# Altium PCB matrix_connect.PcbDoc
Units mm, origin at the board's own origin, x right, y up, seen from the top; angles counter-clockwise.
Board outline 25 x 480 mm, 2 copper layers (Top Layer, Bottom Layer); 32 components, 48 nets, 704 pads, 688 vias.
Unrouted connection lines stored in the file: 329.
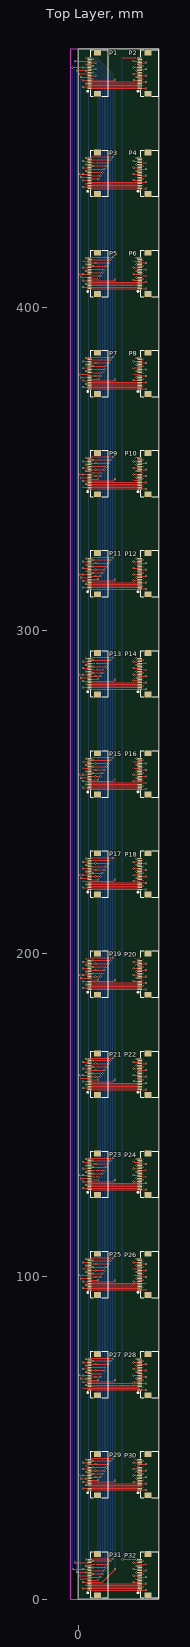
[diagram p0: Top Layer view]
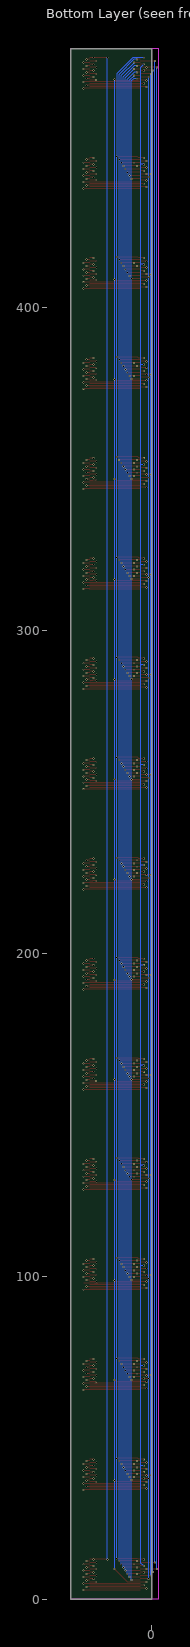
[diagram p1: Bottom Layer view, seen from below]
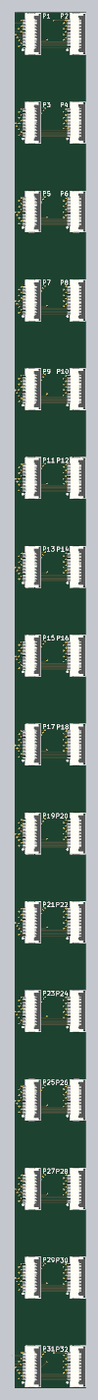
[diagram p2: 3D render of the assembled board from above, using the file's embedded part models]

## Layer stack, top to bottom
Top Solder: solder mask 0.0102, Solder Resist, Dk 3.5
Top Layer: signal copper 0.0356
Dielectric 1: dielectric 0.32, FR-4, Dk 4.8
Bottom Layer: signal copper 0.0356
Bottom Solder: solder mask 0.0102, Solder Resist, Dk 3.5

## Board outline
0,0 25,0 25,480 0,480

## Design rules (kind name [scope] priority, off if disabled: settings)
Clearance [All] p1: gap=0.152
PolygonConnect [All] p1: connectstyle=Relief reliefconductorwidth=0.254 reliefentries=4 polygonreliefangle="90 Angle" airgapwidth=0.254
RoutingVias [All] p1: holewidth=0.3 width=0.6 viastyle="Through Hole" minholewidth=0.3 minwidth=0.6 maxholewidth=0.711 maxwidth=1.27
SolderMaskExpansion [All] p1: expansion=0.102
Width [All] p1: maxlimit=0.254 minlimit=0.254 preferedwidth=0.254
30 further rules are at their usual default settings.

## Classes and differential pairs
component class martix_connect_2: P17 P18 P19 P20 P21 P22 P23 P24 P25 P26 P27 P28 P29 P30 P31 P32
component class martix_connect: P1 P2 P3 P4 P5 P6 P7 P8 P9 P10 P11 P12 P13 P14 P15 P16

## Components (designator, comment, footprint, x,y, rotation, side; value= is the part's Value field where it differs from the comment)
P1 "Header 20" "FPC0.5 2H-WS-20P" 6,472.516 r90 top
P2 "Header 20" "FPC0.5 2H-WS-20P" 21.59,472.517 r90 top
P3 "Header 20" "FPC0.5 2H-WS-20P" 6,441.518 r90 top
P4 "Header 20" "FPC0.5 2H-WS-20P" 21.59,441.519 r90 top
P5 "Header 20" "FPC0.5 2H-WS-20P" 6,410.52 r90 top
P6 "Header 20" "FPC0.5 2H-WS-20P" 21.59,410.52 r90 top
P7 "Header 20" "FPC0.5 2H-WS-20P" 6,379.521 r90 top
P8 "Header 20" "FPC0.5 2H-WS-20P" 21.59,379.522 r90 top
P9 "Header 20" "FPC0.5 2H-WS-20P" 6,348.523 r90 top
P10 "Header 20" "FPC0.5 2H-WS-20P" 21.59,348.524 r90 top
P11 "Header 20" "FPC0.5 2H-WS-20P" 6,317.525 r90 top
P12 "Header 20" "FPC0.5 2H-WS-20P" 21.59,317.526 r90 top
P13 "Header 20" "FPC0.5 2H-WS-20P" 6,286.527 r90 top
P14 "Header 20" "FPC0.5 2H-WS-20P" 21.59,286.527 r90 top
P15 "Header 20" "FPC0.5 2H-WS-20P" 6,255.529 r90 top
P16 "Header 20" "FPC0.5 2H-WS-20P" 21.59,255.529 r90 top
P17 "Header 20" "FPC0.5 2H-WS-20P" 6,224.53 r90 top
P18 "Header 20" "FPC0.5 2H-WS-20P" 21.59,224.531 r90 top
P19 "Header 20" "FPC0.5 2H-WS-20P" 6,193.532 r90 top
P20 "Header 20" "FPC0.5 2H-WS-20P" 21.59,193.533 r90 top
P21 "Header 20" "FPC0.5 2H-WS-20P" 6,162.534 r90 top
P22 "Header 20" "FPC0.5 2H-WS-20P" 21.59,162.534 r90 top
P23 "Header 20" "FPC0.5 2H-WS-20P" 6,131.536 r90 top
P24 "Header 20" "FPC0.5 2H-WS-20P" 21.59,131.536 r90 top
P25 "Header 20" "FPC0.5 2H-WS-20P" 6,100.538 r90 top
P26 "Header 20" "FPC0.5 2H-WS-20P" 21.59,100.538 r90 top
P27 "Header 20" "FPC0.5 2H-WS-20P" 6,69.539 r90 top
P28 "Header 20" "FPC0.5 2H-WS-20P" 21.59,69.54 r90 top
P29 "Header 20" "FPC0.5 2H-WS-20P" 6,38.541 r90 top
P30 "Header 20" "FPC0.5 2H-WS-20P" 21.59,38.541 r90 top
P31 "Header 20" "FPC0.5 2H-WS-20P" 6,7.543 r90 top
P32 "Header 20" "FPC0.5 2H-WS-20P" 21.59,7.543 r90 top

## Footprints (in the part's own frame and the unit in brackets; to place one, negate y for a bottom-side part, rotate by r counter-clockwise, add the part's x,y. Pads: shape width x height; smd on the part's side, far side on the other; paste and mask are expansions set on the pad)
"FPC0.5 2H-WS-20P" [mm] "长：14.2mm，宽：5.2mm，高：2mm"
  rect 1.8x2.2 smd: 0(-6.4,0) 0(6.4,0)
  rect 0.3x1.3 smd: 1(-4.75,2.497) 2(-4.25,2.497) 3(-3.75,2.497) 4(-3.25,2.497) 5(-2.75,2.497) 6(-2.25,2.497) 7(-1.75,2.497) 8(-1.25,2.497) 9(-0.75,2.497) 10(-0.25,2.497) 11(0.25,2.497) 12(0.75,2.497) 13(1.25,2.497) 14(1.75,2.497) 15(2.25,2.497) 16(2.75,2.497) 17(3.25,2.497) 18(3.75,2.497) 19(4.25,2.497) 20(4.75,2.497)
  silkscreen extent -7.18,-3.3 7.18,3.23, body extent -7.1,-3.15 7.1,2.85, height 2

## Part data
P1 P2 P3 P4 P5 P6 P7 P8 P9 P10 P11 P12 P13 P14 P15 P16 P17 P18 P19 P20 P21 P22 P23 P24 P25 P26 P27 P28 P29 P30 P31 P32: "Header, 20-Pin"

## Via types
v1: diameter 0.6, hole 0.3, Top Layer to Bottom Layer, 688 vias

## Nets (pads, with @x,y where several pads share a name; then routed paths per layer and width w, separated by ;. In a path a pad name is that pad's centre, name@x,y a point inside that pad or via, vN(x,y) a via of type N, cw(c..) or ccw(c..) an arc to the next point about the centre after c; other vN are vias at no path point)
GND: P1.3 P1.4 P2.3 P2.4 P3.3 P3.4 P4.3 P4.4 P5.3 P5.4 P6.3 P6.4 P7.3 P7.4 P8.3 P8.4 P9.3 P9.4 P10.3 P10.4 P11.3 P11.4 P12.3 P12.4 P13.3 P13.4 P14.3 P14.4 P15.3 P15.4 P16.3 P16.4 P17.3 P17.4 P18.3 P18.4 P19.3 P19.4 P20.3 P20.4 P21.3 P21.4 P22.3 P22.4 P23.3 P23.4 P24.3 P24.4 P25.3 P25.4 P26.3 P26.4 P27.3 P27.4 P28.3 P28.4 P29.3 P29.4 P30.3 P30.4 P31.3 P31.4 P32.3 P32.4 | length 564.3
  Top Layer w0.254: v1(2.426,4.293) P31.4 3.504,4.294 P32.4@19.093,4.294 ; v1(2.426,35.291) P29.4 3.504,35.292 P30.4@19.093,35.292 ; v1(2.426,66.289) P27.4 P28.4 ; v1(2.426,97.288) P25.4 ; v1(2.426,128.286) P23.4 ; v1(2.426,159.284) P21.4 3.504,159.285 19.093,159.285 18.016,159.284 ; v1(2.426,190.282) P19.4 3.504,190.283 19.093,190.283 18.016,190.283 ; v1(2.426,221.28) P17.4 3.504,221.281 19.093,221.281 18.016,221.281 ; v1(2.426,252.279) P15.4 3.504,252.28 19.093,252.28 18.016,252.279 ; v1(2.426,283.277) P13.4 3.504,283.278 P14.4 18.016,283.277 ; v1(2.426,314.275) P11.4 3.504,314.276 P12.4 18.016,314.276 ; v1(2.426,345.273) P9.4 3.504,345.274 P10.4 18.016,345.274 ; v1(2.426,376.271) P7.4 3.504,376.272 P8.4 18.016,376.272 ; v1(2.426,407.27) P5.4 3.504,407.271 P6.4 18.016,407.27 ; v1(2.426,438.268) P3.4 3.504,438.269 P4.4 ; v1(2.426,469.266) P1.4 3.504,469.267 P2.4 ; P31.3 P32.3 19.093,3.794 v1(20.17,3.793) ; P29.3 P30.3 19.093,34.792 v1(20.17,34.791) ; P27.3 P28.3 19.093,65.79 v1(20.17,65.79) ; P25.3 P26.3 18.274,96.788 ; P23.3 P24.3 19.093,127.787 v1(20.17,127.786) ; P21.3 19.092,158.784 P22.3 ; P19.3 19.092,189.782 P20.3 ; P17.3 19.092,220.78 P18.3 ; P15.3 19.092,251.779 P16.3 ; P13.3 19.092,282.777 P14.3 ; P11.3 19.092,313.775 P12.3 ; P9.3 19.092,344.773 P10.3 v1(20.17,344.774) ; P7.3 19.092,375.771 P8.3 v1(20.17,375.772) ; P5.3 P6.3 P6.3 v1(20.17,406.77) ; P3.3 P4.3 P4.3 v1(20.17,437.769) ; P1.3 P2.3 P2.3 v1(20.17,468.767) ; P27.4@3.504,66.29 P28.4@19.093,66.29 ; P23.4 P24.4 ; 4.312,97.288 P25.4 ; 18.016,4.293 P32.4 ; 18.016,35.291 P30.4 ; 18.016,438.269 P4.4 ; 18.288,97.282 18.288,97.288 P26.4 3.504,97.289 P25.4 ; P26.3 v1(20.17,96.788) ; P22.3 v1(20.17,158.784) ; P20.3 v1(20.17,189.783) ; P18.3 v1(20.17,220.781) ; P16.3 v1(20.17,251.779) ; P14.3 v1(20.17,282.777) ; P12.3 v1(20.17,313.776)
M_C_1: P1.6 P3.6 P5.6 P7.6 P9.6 P11.6 P13.6 P15.6 P17.6 P19.6 P21.6 P23.6 P25.6 P27.6 P29.6 P31.6 | length 615.8
  Top Layer w0.254: v1(1.566,5.293) P31.6 7.452,5.293 v1(11.43,9.271) ; v1(1.566,36.291) P29.6 3.519,36.275 11.002,36.275 v1(11.43,36.703) ; v1(1.566,67.289) P27.6 3.519,67.273 10.922,67.273 11.43,67.781 v1(11.43,67.818) ; v1(1.566,98.288) P25.6 5.885,98.288 5.965,98.208 10.959,98.208 v1(11.43,98.679) ; v1(1.566,129.286) P23.6 3.519,129.27 10.906,129.27 v1(11.43,129.794) ; v1(1.566,160.284) P21.6 3.519,160.268 10.789,160.268 v1(11.43,160.909) ; v1(1.566,191.282) P19.6 3.519,191.266 11.053,191.266 v1(11.43,191.643) ; v1(1.566,222.28) P17.6 3.519,222.264 10.936,222.264 v1(11.43,222.758) ; v1(1.566,253.279) P15.6 3.519,253.262 10.819,253.262 v1(11.43,253.873) ; v1(1.566,284.277) P13.6 3.519,284.261 10.957,284.261 v1(11.43,284.734) ; v1(1.566,315.275) P11.6 3.519,315.259 10.967,315.259 v1(11.43,315.722) ; v1(1.566,346.273) P9.6 3.519,346.257 10.85,346.257 v1(11.43,346.837) ; v1(1.566,377.271) P7.6 3.529,377.246 10.978,377.246 v1(11.43,377.698) ; v1(1.566,408.27) P5.6 3.512,408.261 11.132,408.261 v1(11.43,408.559) ; v1(1.566,439.268) P3.6 ; v1(1.566,470.266) P1.6 4.198,470.266 4.292,470.172 11.067,470.172 v1(11.43,470.535)
  Bottom Layer w0.254: v1(11.43,9.271) v1(11.43,36.703) v1(11.43,67.818) v1(11.43,98.679) v1(11.43,129.794) v1(11.43,160.909) v1(11.43,191.643) v1(11.43,222.758) v1(11.43,253.873) v1(11.43,284.734) v1(11.43,315.722) v1(11.43,346.837) v1(11.43,377.698) v1(11.43,408.559) v1(11.43,470.535)
M_C_2: P1.7 P3.7 P5.7 P7.7 P9.7 P11.7 P13.7 P15.7 P17.7 P19.7 P21.7 P23.7 P25.7 P27.7 P29.7 P31.7 | length 508.6
  Top Layer w0.254: P31.7 6.223,5.793 v1(6.223,5.944) ; P29.7 6.127,36.791 v1(6.19,36.854) ; P27.7 6.127,67.789 v1(6.19,67.853) ; P25.7 v1(6.205,98.788) ; P23.7 6.127,129.786 v1(6.19,129.849) ; P21.7 6.127,160.784 v1(6.19,160.847) ; P19.7 6.127,191.782 v1(6.19,191.845) ; P17.7 6.127,222.78 v1(6.19,222.844) ; P15.7 6.127,253.779 v1(6.19,253.842) ; P13.7 6.127,284.777 v1(6.19,284.84) ; P11.7 v1@6.297,315.775 ; P9.7 6.16,346.773 v1(6.223,346.836) ; P7.7 6.296,377.771 v1(6.243,377.825) ; P5.7 6.18,408.77 v1(6.25,408.84) ; P3.7 v1(6.256,439.768) ; P1.7 v1(4.58,470.766)
  Bottom Layer w0.254: v1(4.58,470.766) 5.611,470.766 6.256,470.121 v1(6.256,439.768) v1@6.256,408.813 ; v1(6.223,5.944) 6.223,5.908 6.256,5.875 6.256,36.854 6.256,253.842 6.256,284.84 6.256,346.836 v1@6.256,408.813 ; v1@6.223,377.825 v1(6.243,377.825) ; v1(6.25,408.84) 6.25,408.819 v1@6.256,408.813
  other v1: 6.19,315.838
M_C_3: P1.8 P3.8 P5.8 P7.8 P9.8 P11.8 P13.8 P15.8 P17.8 P19.8 P21.8 P23.8 P25.8 P27.8 P29.8 P31.8 | length 506.9
  Top Layer w0.254: v1(0.889,37.338) 0.936,37.291 v1(2.426,37.291) P29.8 ; v1(0.889,99.314) 0.915,99.288 P25.8 ; v1(0.889,130.302) 0.905,130.286 P23.8 ; v1(0.889,161.29) 0.895,161.284 P21.8 ; v1(0.889,192.278) 0.893,192.282 P19.8 ; v1(0.889,223.266) 0.903,223.28 P17.8 ; v1(0.889,285.242) 0.924,285.277 P13.8 ; v1(0.889,347.218) 0.944,347.273 P9.8 ; v1(0.889,378.333) 0.951,378.271 P7.8 ; v1(0.889,409.321) 0.94,409.27 P5.8 ; v1(0.889,440.309) 0.93,440.268 P3.8 ; v1@0.889,471.266 P1.8 ; v1@0.926,68.289 v1(2.426,68.289) P27.8 ; v1(0.934,316.275) P11.8 ; v1(0.959,6.293) P31.8 ; v1@0.991,254.279 P15.8
  Bottom Layer w0.254: v1(0.889,471.297) v1(0.889,440.309) v1(0.889,409.321) v1(0.889,378.333) v1(0.889,347.218) v1@0.889,316.23 ; v1@0.926,68.289 v1(0.889,68.326) ; v1(0.934,316.275) v1@0.889,316.23 ; v1(0.959,6.293) 0.889,6.363 v1(0.889,37.338) v1(0.889,68.326) ; v1(0.889,68.326) v1(0.889,99.314) v1(0.889,130.302) v1(0.889,161.29) v1(0.889,192.278) v1(0.889,223.266) v1(0.889,254.254) v1(0.889,285.242) v1@0.889,316.23
M_C_4: P1.9 P3.9 P5.9 P7.9 P9.9 P11.9 P13.9 P15.9 P17.9 P19.9 P21.9 P23.9 P25.9 P27.9 P29.9 P31.9 | length 518.4
  Top Layer w0.254: P31.9 v1(6.894,6.793) ; P29.9 v1(5.44,37.791) v1(6.872,37.791) ; P27.9 v1(5.44,68.789) v1(6.872,68.789) ; P25.9 v1(5.44,99.788) v1(6.872,99.788) ; P23.9 v1(5.44,130.786) v1(6.872,130.786) ; P21.9 v1(5.44,161.784) v1(6.872,161.784) ; P19.9 v1(5.44,192.782) v1(6.872,192.782) ; P17.9 v1(5.44,223.78) v1(6.872,223.78) ; P15.9 v1(5.44,254.779) v1(6.872,254.779) ; P13.9 v1(5.44,285.777) v1(6.872,285.777) ; P11.9 v1(5.44,316.775) v1(6.872,316.775) ; P9.9 v1(5.44,347.773) v1(6.905,347.773) ; P7.9 v1(5.44,378.771) v1(6.915,378.771) ; P5.9 6.84,409.77 v1(6.907,409.702) ; P3.9 v1(6.907,440.768) ; P1.9 v1(5.44,471.766)
  Bottom Layer w0.254: v1(5.44,471.766) 6.907,470.299 v1(6.907,440.768) v1(6.907,409.702) v1@6.907,378.763 ; v1@6.858,378.714 v1@6.907,378.763 ; v1(6.905,347.773) v1(6.905,347.773) ; v1@6.907,6.793 6.907,37.791 6.907,254.779 6.907,316.775 v1(6.905,347.773) ; v1(6.915,378.771) v1@6.907,378.763 ; v1@6.985,347.853 v1(6.905,347.773) ; v1(6.905,347.773) v1@6.907,378.763
M_C_5: P1.10 P3.10 P5.10 P7.10 P9.10 P11.10 P13.10 P15.10 P17.10 P19.10 P21.10 P23.10 P25.10 P27.10 P29.10 P31.10 | length 517.1
  Top Layer w0.254: v1@0.254,7.293 P31.10 ; v1(0.254,38.354) 0.317,38.291 v1(1.566,38.291) P29.10 ; v1(0.254,69.342) 0.307,69.289 v1(1.566,69.289) P27.10 ; v1(0.254,100.33) 0.296,100.288 v1(1.566,100.288) P25.10 ; v1(0.254,131.318) 0.286,131.286 v1(1.566,131.286) P23.10 ; v1(0.254,162.306) 0.276,162.284 v1(1.566,162.284) P21.10 ; v1(0.254,193.294) 0.266,193.282 v1(1.566,193.282) P19.10 ; v1(0.254,224.282) 0.256,224.28 v1(1.566,224.28) P17.10 ; v1(0.254,255.27) 0.263,255.279 v1(1.566,255.279) P15.10 ; v1(0.254,286.258) 0.273,286.277 v1(1.566,286.277) P13.10 ; v1(0.254,317.246) 0.283,317.275 v1(1.566,317.275) P11.10 ; v1(0.254,348.234) 0.293,348.273 v1(1.566,348.273) P9.10 ; v1(0.254,379.222) 0.303,379.271 v1(1.566,379.271) P7.10 ; v1(0.254,410.21) 0.314,410.27 v1(1.566,410.27) P5.10 ; v1(0.254,441.325) 0.311,441.268 v1(1.566,441.268) P3.10 ; v1@0.301,472.266 P1.10
  Bottom Layer w0.254: v1(0.254,7.239) v1(0.254,38.354) v1(0.254,69.342) v1(0.254,100.33) v1(0.254,131.318) v1(0.254,162.306) v1(0.254,193.294) v1(0.254,224.282) v1(0.254,255.27) v1(0.254,286.258) v1(0.254,317.246) v1(0.254,348.234) v1(0.254,379.222) v1(0.254,410.21) v1(0.254,441.325) v1@0.254,472.186
  other v1: 0.254,472.219
M_C_6: P1.11 P3.11 P5.11 P7.11 P9.11 P11.11 P13.11 P15.11 P17.11 P19.11 P21.11 P23.11 P25.11 P27.11 P29.11 P31.11 | length 527.7
  Top Layer w0.254: P31.11 v1(4.58,7.793) v1@7.285,7.793 ; P29.11 v1(4.58,38.791) v1(7.491,38.791) ; P27.11 v1(4.58,69.789) v1(7.491,69.789) ; P25.11 v1(4.58,100.788) v1(7.491,100.788) ; P23.11 v1(4.58,131.786) v1(7.491,131.786) ; P21.11 v1(4.58,162.784) v1(7.491,162.784) ; P19.11 v1(4.58,193.782) v1(7.491,193.782) ; P17.11 v1(4.58,224.78) v1(7.491,224.78) ; P15.11 v1(4.58,255.779) v1(7.491,255.779) ; P13.11 v1(4.58,286.777) v1(7.491,286.777) ; P11.11 v1(4.58,317.775) v1(7.491,317.775) ; P9.11 v1(4.58,348.773) v1(7.524,348.773) ; P7.11 7.579,379.771 v1(7.555,379.748) ; P5.11 7.568,410.77 v1(7.555,410.756) ; P3.11 v1(7.555,441.768) ; P1.11 v1(4.58,472.766)
  Bottom Layer w0.254: v1(4.58,472.766) 5.389,472.766 7.555,470.6 v1(7.555,441.768) v1(7.555,410.756) 7.549,410.75 7.549,380.506 7.555,380.5 v1(7.555,379.748) v1@7.555,348.773 ; v1@7.493,348.742 v1(7.524,348.773) ; v1@7.555,348.742 7.555,255.779 7.555,193.782 7.555,100.788 7.555,7.809 v1(7.558,7.809)
M_C_7: P1.12 P3.12 P5.12 P7.12 P9.12 P11.12 P13.12 P15.12 P17.12 P19.12 P21.12 P23.12 P25.12 P27.12 P29.12 P31.12 | length 487.9
  Top Layer w0.254: v1(-0.381,8.382) 2.337,8.382 v1(2.426,8.293) P31.12 ; v1(-0.381,473.329) 2.235,473.329 2.362,473.202 v1(2.426,473.266) P1.12 ; v1(2.426,39.291) P29.12 ; v1(2.426,70.289) P27.12 ; v1(2.426,101.288) P25.12 ; v1(2.426,132.286) P23.12 ; v1(2.426,163.284) P21.12 ; v1(2.426,194.282) P19.12 ; v1(2.426,225.28) P17.12 ; v1(2.426,256.279) P15.12 ; v1(2.426,287.277) P13.12 ; v1(2.426,318.275) P11.12 ; v1(2.426,349.273) P9.12 ; v1(2.426,380.271) P7.12 ; v1(2.426,411.27) P5.12 ; v1(2.426,442.268) P3.12
  Bottom Layer w0.254: v1(-0.381,8.382) v1(-0.381,473.329)
M_C_8: P1.13 P3.13 P5.13 P7.13 P9.13 P11.13 P13.13 P15.13 P17.13 P19.13 P21.13 P23.13 P25.13 P27.13 P29.13 P31.13 | length 538.1
  Top Layer w0.254: P31.13 v1(8.158,8.793) ; P29.13 v1(5.44,39.791) 8.169,39.791 v1(8.174,39.786) ; P27.13 v1(5.44,70.789) 8.169,70.789 v1(8.174,70.784) ; P25.13 v1(5.44,101.788) 8.169,101.788 v1(8.174,101.783) ; P23.13 v1(5.44,132.786) 8.169,132.786 v1(8.174,132.781) ; P21.13 v1(5.44,163.784) 8.169,163.784 v1(8.174,163.779) ; P19.13 v1(5.44,194.782) 8.169,194.782 v1(8.174,194.777) ; P17.13 v1(5.44,225.78) 8.169,225.78 v1(8.174,225.775) ; P15.13 v1(5.44,256.779) 8.169,256.779 v1(8.174,256.774) ; P13.13 v1(5.44,287.777) 8.169,287.777 v1(8.174,287.772) ; P11.13 v1(5.44,318.775) 8.169,318.775 v1(8.174,318.77) ; P9.13 v1(5.44,349.773) v1(8.159,349.773) ; P7.13 8.103,380.771 v1(8.128,380.746) ; P5.13 v1(8.164,411.77) ; P3.13 v1(8.174,442.768) ; P1.13 v1(5.44,473.766)
  Bottom Layer w0.254: v1(5.44,473.766) 5.472,473.766 8.174,471.064 v1(8.174,442.768) 8.174,411.78 v1(8.164,411.77) ; v1(8.128,380.746) v1@8.174,380.746 ; v1(8.158,8.793) 8.174,8.809 v1(8.174,39.786) v1(8.174,70.784) v1(8.174,101.783) v1(8.174,132.781) v1(8.174,163.779) v1(8.174,194.777) v1(8.174,225.775) v1(8.174,256.774) v1(8.174,287.772) v1(8.174,318.77) v1@8.174,349.758 ; v1(8.159,349.773) v1@8.174,349.758 ; v1@8.174,411.77 v1@8.174,380.746 ; v1@8.174,349.758 v1@8.174,380.746
M_C_9: P1.14 P3.14 P5.14 P7.14 P9.14 P11.14 P13.14 P15.14 P17.14 P19.14 P21.14 P23.14 P25.14 P27.14 P29.14 P31.14 | length 502.5
  Top Layer w0.254: v1(-1.699,474.266) v1(1.566,474.266) P1.14 ; v1(-1.651,9.271) 1.544,9.271 v1(1.566,9.293) P31.14 ; v1(1.566,40.291) P29.14 ; v1(1.566,71.289) P27.14 ; v1(1.566,102.288) P25.14 ; v1(1.566,133.286) P23.14 ; v1(1.566,164.284) P21.14 ; v1(1.566,195.282) P19.14 ; v1(1.566,226.28) P17.14 ; v1(1.566,257.279) P15.14 ; v1(1.566,288.277) P13.14 ; v1(1.566,319.275) P11.14 ; v1(1.566,350.273) P9.14 ; v1(1.566,381.271) P7.14 ; v1(1.566,412.27) P5.14 ; v1(1.566,443.268) P3.14
  Bottom Layer w0.254: v1(-1.699,474.266) -1.651,474.218 v1(-1.651,9.271)
M_C_10: P1.15 P3.15 P5.15 P7.15 P9.15 P11.15 P13.15 P15.15 P17.15 P19.15 P21.15 P23.15 P25.15 P27.15 P29.15 P31.15 | length 547.2
  Top Layer w0.254: P31.15 v1(4.58,9.793) v1@8.749,9.793 ; P29.15 v1(4.58,40.791) 8.752,40.791 v1(8.763,40.802) ; P27.15 v1(4.58,71.789) 8.752,71.789 v1(8.763,71.8) ; P25.15 v1(4.58,102.788) 8.752,102.788 v1(8.763,102.799) ; P23.15 v1(4.58,133.786) 8.752,133.786 v1(8.763,133.797) ; P21.15 v1(4.58,164.784) 8.752,164.784 v1(8.763,164.795) ; P19.15 v1(4.58,195.782) 8.752,195.782 v1(8.763,195.793) ; P17.15 v1(4.58,226.78) 8.752,226.78 v1(8.763,226.791) ; P15.15 v1(4.58,257.779) 8.752,257.779 v1(8.763,257.79) ; P13.15 v1(4.58,288.777) 8.752,288.777 v1(8.763,288.788) ; P11.15 v1(4.58,319.775) 8.752,319.775 v1(8.763,319.786) ; P9.15 v1(4.58,350.773) v1(8.763,350.774) ; P7.15 v1(4.58,381.771) 8.754,381.771 v1(8.763,381.762) ; P5.15 v1(4.58,412.77) 8.743,412.77 v1(8.763,412.75) ; P3.15 v1(4.58,443.768) 8.733,443.768 v1(8.763,443.738) ; P1.15 v1(4.58,474.766)
  Bottom Layer w0.254: v1(4.58,474.766) 5.421,474.766 8.763,471.424 v1(8.763,443.738) v1(8.763,412.75) v1(8.763,381.762) v1(8.763,350.774) v1(8.763,319.786) v1(8.763,288.788) v1(8.763,257.79) v1(8.763,226.791) v1(8.763,195.793) v1(8.763,164.795) v1(8.763,133.797) v1(8.763,102.799) v1(8.763,71.8) v1(8.763,40.802) v1(8.763,9.779)
M_C_11: P1.16 P3.16 P5.16 P7.16 P9.16 P11.16 P13.16 P15.16 P17.16 P19.16 P21.16 P23.16 P25.16 P27.16 P29.16 P31.16 | length 495.4
  Top Layer w0.254: v1(2.426,10.293) P31.16 ; v1(2.426,41.291) P29.16 ; v1(2.426,72.289) P27.16 ; v1(2.426,103.288) P25.16 ; v1(2.426,134.286) P23.16 ; v1(2.426,165.284) P21.16 ; v1(2.426,196.282) P19.16 ; v1(2.426,227.28) P17.16 ; v1(2.426,258.279) P15.16 ; v1(2.426,289.277) P13.16 ; v1(2.426,320.275) P11.16 ; v1(2.426,351.273) P9.16 ; v1(2.426,382.271) P7.16 ; v1(2.426,413.27) P5.16 ; v1(2.426,444.268) P3.16 ; v1(2.426,475.266) P1.16
  Bottom Layer w0.254: v1(2.426,10.293) 3.302,11.169 3.302,41.275 ; v1(2.426,41.291) 3.286,41.291 3.302,41.275 ; v1(2.426,72.289) 3.276,72.289 3.302,72.263 ; v1(2.426,103.288) 3.265,103.288 3.302,103.251 ; v1(2.426,134.286) 3.255,134.286 3.302,134.239 ; v1(2.426,165.284) 3.245,165.284 3.302,165.227 ; v1(2.426,196.282) 3.235,196.282 3.302,196.215 ; v1(2.426,227.28) 3.225,227.28 3.302,227.203 ; v1(2.426,258.279) 3.263,258.279 3.302,258.318 ; v1(2.426,289.277) 3.204,289.277 3.302,289.179 ; v1(2.426,320.275) 3.283,320.275 3.302,320.294 ; v1(2.426,351.273) 3.293,351.273 3.302,351.282 ; v1(2.426,382.271) 3.301,382.271 3.302,382.27 ; v1(2.426,413.27) 3.29,413.27 3.302,413.258 ; v1(2.426,444.268) 3.28,444.268 3.302,444.246 ; v1(2.426,475.266) 3.302,474.39 3.302,444.246 ; 3.302,41.275 3.302,72.263 ; 3.302,72.263 3.302,103.251 ; 3.302,103.251 3.302,134.239 ; 3.302,134.239 3.302,165.227 ; 3.302,165.227 3.302,196.215 ; 3.302,196.215 3.302,227.203 ; 3.302,227.203 3.302,258.318 ; 3.302,258.318 3.302,289.179 ; 3.302,289.179 3.302,320.294 ; 3.302,320.294 3.302,351.282 ; 3.302,351.282 3.302,382.27 ; 3.302,382.27 3.302,413.258 ; 3.302,413.258 3.302,444.246
M_C_12: P1.17 P3.17 P5.17 P7.17 P9.17 P11.17 P13.17 P15.17 P17.17 P19.17 P21.17 P23.17 P25.17 P27.17 P29.17 P31.17 | length 556.7
  Top Layer w0.254: P31.17 v1(5.44,10.793) v1(9.4,10.793) ; P29.17 v1(5.44,41.791) 9.348,41.791 v1(9.365,41.808) ; P27.17 v1(5.44,72.789) 9.348,72.789 v1(9.365,72.806) ; P25.17 v1(5.44,103.788) 9.348,103.788 v1(9.365,103.804) ; P23.17 v1(5.44,134.786) 9.348,134.786 v1(9.365,134.803) ; P21.17 v1(5.44,165.784) 9.348,165.784 v1(9.365,165.801) ; P19.17 v1(5.44,196.782) 9.348,196.782 v1(9.365,196.799) ; P17.17 v1(5.44,227.78) 9.348,227.78 v1(9.365,227.797) ; P15.17 v1(5.44,258.779) 9.348,258.779 v1(9.365,258.795) ; P13.17 v1(5.44,289.777) 9.348,289.777 v1(9.365,289.794) ; P11.17 v1(5.44,320.775) 9.348,320.775 v1(9.365,320.792) ; P9.17 v1(5.44,351.773) 9.381,351.773 v1(9.398,351.79) ; P7.17 v1(5.44,382.771) 9.391,382.771 v1(9.398,382.778) ; P5.17 v1(5.44,413.77) 9.394,413.77 v1(9.398,413.766) ; P3.17 v1(5.44,444.768) v1(9.384,444.768) ; P1.17 v1(5.44,475.766)
  Bottom Layer w0.254: v1(5.44,475.766) 9.384,471.822 v1(9.384,444.768) 9.384,320.792 9.384,227.797 9.384,165.801 9.384,41.808 9.384,10.809 v1(9.4,10.793)
M_C_13: P1.18 P3.18 P5.18 P7.18 P9.18 P11.18 P13.18 P15.18 P17.18 P19.18 P21.18 P23.18 P25.18 P27.18 P29.18 P31.18 | length 501.1
  Top Layer w0.254: v1(-1.016,11.293) P31.18 ; v1(-1.016,476.25) 3.487,476.25 P1.18 ; v1(1.566,42.291) P29.18 ; v1(1.566,73.289) P27.18 ; v1(1.566,104.288) P25.18 ; v1(1.566,135.286) P23.18 ; v1(1.566,166.284) P21.18 ; v1(1.566,197.282) P19.18 ; v1(1.566,228.28) P17.18 ; v1(1.566,259.279) P15.18 ; v1(1.566,290.277) P13.18 ; v1(1.566,321.275) P11.18 ; v1(1.566,352.273) P9.18 ; v1(1.566,383.271) P7.18 ; v1(1.566,414.27) P5.18 ; v1(1.566,445.268) P3.18
  Bottom Layer w0.254: v1(-1.016,11.293) v1(-1.016,476.25)
M_C_14: P1.19 P3.19 P5.19 P7.19 P9.19 P11.19 P13.19 P15.19 P17.19 P19.19 P21.19 P23.19 P25.19 P27.19 P29.19 P31.19 | length 566.9
  Top Layer w0.254: P31.19 v1(4.58,11.793) 4.602,11.815 v1(10.033,11.815) ; P29.19 v1(4.58,42.791) v1(10.033,42.791) ; P27.19 v1(4.58,73.789) v1(10.033,73.789) ; P25.19 v1(4.58,104.788) v1(10.033,104.788) ; P23.19 v1(4.58,135.786) v1(10.033,135.786) ; P21.19 v1(4.58,166.784) v1(10.033,166.784) ; P19.19 v1(4.58,197.782) v1(10.033,197.782) ; P17.19 v1(4.58,228.78) v1(10.033,228.78) ; P15.19 v1(4.58,259.779) v1(10.033,259.779) ; P13.19 v1(4.58,290.777) v1(10.033,290.777) ; P11.19 v1(4.58,321.775) v1(10.033,321.775) ; P9.19 v1(4.58,352.773) v1(10.066,352.773) ; P7.19 10.01,383.771 v1(10.033,383.794) ; P5.19 10.021,414.77 v1(10.033,414.782) ; P3.19 v1(10.035,445.768) ; P1.19 3.511,476.758 v1(4.572,476.758)
  Bottom Layer w0.254: v1(4.572,476.758) 5.461,476.758 10.035,472.184 v1(10.035,445.768) v1@10.035,352.773 ; v1(10.033,11.815) 10.035,11.813 10.035,73.789 10.035,228.78 v1@10.035,352.679 ; v1(10.066,352.773) v1@10.16,352.679
M_C_15: P1.20 P3.20 P5.20 P7.20 P9.20 P11.20 P13.20 P15.20 P17.20 P19.20 P21.20 P23.20 P25.20 P27.20 P29.20 P31.20 | length 598.7
  Top Layer w0.254: v1(2.413,477.266) P1.20 ; v1(2.426,12.293) P31.20 4.165,12.293 4.445,12.573 v1(10.795,12.573) ; v1(2.426,43.291) P29.20 4.048,43.291 4.318,43.561 v1(10.795,43.561) ; v1(2.426,74.289) P27.20 4.058,74.289 4.318,74.549 v1(10.795,74.549) ; v1(2.426,105.288) P25.20 3.942,105.288 4.318,105.664 v1(10.795,105.664) ; v1(2.426,136.286) P23.20 3.952,136.286 4.191,136.525 v1(10.795,136.525) ; v1(2.426,167.284) P21.20 3.962,167.284 4.191,167.513 v1(10.795,167.513) ; v1(2.426,198.282) P19.20 3.972,198.282 4.318,198.628 v1(10.795,198.628) ; v1(2.426,229.28) P17.20 3.982,229.28 4.191,229.489 v1(10.795,229.489) ; v1(2.426,260.279) P15.20 3.993,260.279 4.318,260.604 v1(10.795,260.604) ; v1(2.426,291.277) P13.20 4.003,291.277 4.318,291.592 v1(10.795,291.592) ; v1(2.426,322.275) P11.20 3.886,322.275 4.191,322.58 v1(10.795,322.58) ; v1(2.426,353.273) P9.20 3.896,353.273 4.318,353.695 v1(10.795,353.695) ; v1(2.426,384.271) P7.20 4.033,384.271 4.318,384.556 v1(10.795,384.556) ; v1(2.426,415.27) P5.20 4.044,415.27 4.318,415.544 v1(10.795,415.544) ; v1(2.426,446.268) P3.20 4.054,446.268 4.445,446.659 v1(10.795,446.659)
  Bottom Layer w0.254: v1(2.413,477.266) 2.484,477.337 5.771,477.337 10.795,472.313 v1(10.795,446.659) v1(10.795,415.544) v1(10.795,384.556) v1(10.795,353.695) v1(10.795,322.58) v1(10.795,291.592) v1(10.795,260.604) v1(10.795,229.489) v1(10.795,198.628) v1(10.795,167.513) v1(10.795,136.525) v1(10.795,105.664) v1(10.795,74.549) v1(10.795,43.561) v1(10.795,12.573)
M_C_16: P2.6 P4.6 P6.6 P8.6 P10.6 P12.6 P14.6 P16.6 P18.6 P20.6 P22.6 P24.6 P26.6 P28.6 P30.6 P32.6 | length 31.5
  Top Layer w0.254: v1(17.145,191.389) 18.291,191.389 18.327,191.353 19.022,191.353 P20.6 ; v1(17.145,222.377) 18.302,222.377 18.327,222.351 19.022,222.351 P18.6 ; v1(17.145,253.365) 18.312,253.365 18.327,253.35 19.022,253.35 P16.6 ; v1(17.145,284.48) 18.195,284.48 18.327,284.348 19.022,284.348 P14.6 ; v1(17.145,315.468) 18.206,315.468 18.327,315.346 19.022,315.346 P12.6 ; v1(17.145,346.456) 18.216,346.456 18.327,346.345 19.022,346.345 P10.6 ; v1(17.145,377.444) 18.226,377.444 18.327,377.343 19.022,377.343 P8.6 ; v1(17.145,408.432) 18.236,408.432 18.327,408.341 19.022,408.341 P6.6 ; v1(17.145,439.42) 18.247,439.42 18.327,439.339 19.022,439.339 P4.6 ; v1(17.156,5.294) P32.6 P32.6 ; v1(17.156,36.292) P30.6 P30.6 ; v1(17.156,67.29) P28.6 ; v1(17.156,98.289) P26.6 ; v1(17.156,129.286) P24.6 ; v1(17.272,160.401) 17.318,160.355 19.022,160.355 P22.6 ; v1(17.272,470.408) 17.342,470.338 19.022,470.338 P2.6
M_C_17: P2.7 P4.7 P6.7 P8.7 P10.7 P12.7 P14.7 P16.7 P18.7 P20.7 P22.7 P24.7 P26.7 P28.7 P30.7 P32.7 | length 17.2
  Top Layer w0.254: P32.7 v1(20.17,5.793) ; P30.7 v1(20.17,36.791) ; P28.7 v1(20.17,67.79) ; P26.7 v1(20.17,98.788) ; P24.7 v1(20.17,129.786) ; P22.7 v1(20.17,160.784) ; P20.7 v1(20.17,191.783) ; P18.7 v1(20.17,222.781) ; P16.7 v1(20.17,253.779) ; P14.7 v1(20.17,284.777) ; P12.7 v1(20.17,315.776) ; P10.7 v1(20.17,346.774) ; P8.7 v1(20.17,377.772) ; P6.7 v1(20.17,408.77) ; P4.7 v1(20.17,439.769) ; P2.7 v1(20.17,470.767)
M_C_18: P2.8 P4.8 P6.8 P8.8 P10.8 P12.8 P14.8 P16.8 P18.8 P20.8 P22.8 P24.8 P26.8 P28.8 P30.8 P32.8 | length 17.2
  Top Layer w0.254: v1(18.016,6.293) P32.8 ; v1(18.016,37.291) P30.8 ; v1(18.016,68.29) P28.8 ; v1(18.016,99.288) P26.8 ; v1(18.016,130.286) P24.8 ; v1(18.016,161.284) P22.8 ; v1(18.016,192.283) P20.8 ; v1(18.016,223.281) P18.8 ; v1(18.016,254.279) P16.8 ; v1(18.016,285.277) P14.8 ; v1(18.016,316.276) P12.8 ; v1(18.016,347.274) P10.8 ; v1(18.016,378.272) P8.8 ; v1(18.016,409.27) P6.8 ; v1(18.016,440.269) P4.8 ; v1(18.016,471.267) P2.8
M_C_19: P2.9 P4.9 P6.9 P8.9 P10.9 P12.9 P14.9 P16.9 P18.9 P20.9 P22.9 P24.9 P26.9 P28.9 P30.9 P32.9 | length 31
  Top Layer w0.254: P32.9 v1(21.03,6.793) ; P30.9 v1(21.03,37.791) ; P28.9 v1(21.03,68.79) ; P26.9 v1(21.03,99.788) ; P24.9 v1(21.03,130.786) ; P22.9 v1(21.03,161.784) ; P20.9 v1(21.03,192.783) ; P18.9 v1(21.03,223.781) ; P16.9 v1(21.03,254.779) ; P14.9 v1(21.03,285.777) ; P12.9 v1(21.03,316.776) ; P10.9 v1(21.03,347.774) ; P8.9 v1(21.03,378.772) ; P6.9 v1(21.03,409.77) ; P4.9 v1(21.03,440.769) ; P2.9 v1(21.03,471.767)
M_C_20: P2.10 P4.10 P6.10 P8.10 P10.10 P12.10 P14.10 P16.10 P18.10 P20.10 P22.10 P24.10 P26.10 P28.10 P30.10 P32.10 | length 31
  Top Layer w0.254: v1(17.156,7.293) P32.10 ; v1(17.156,38.291) P30.10 ; v1(17.156,69.29) P28.10 ; v1(17.156,100.288) P26.10 ; v1(17.156,131.286) P24.10 ; v1(17.156,162.284) P22.10 ; v1(17.156,193.283) P20.10 ; v1(17.156,224.281) P18.10 ; v1(17.156,255.279) P16.10 ; v1(17.156,286.277) P14.10 ; v1(17.156,317.276) P12.10 ; v1(17.156,348.274) P10.10 ; v1(17.156,379.272) P8.10 ; v1(17.156,410.27) P6.10 ; v1(17.156,441.269) P4.10 ; v1(17.156,472.267) P2.10
M_C_21: P2.11 P4.11 P6.11 P8.11 P10.11 P12.11 P14.11 P16.11 P18.11 P20.11 P22.11 P24.11 P26.11 P28.11 P30.11 P32.11 | length 17.2
  Top Layer w0.254: P32.11 v1(20.17,7.793) ; P30.11 v1(20.17,38.791) ; P28.11 v1(20.17,69.79) ; P26.11 v1(20.17,100.788) ; P24.11 v1(20.17,131.786) ; P22.11 v1(20.17,162.784) ; P20.11 v1(20.17,193.783) ; P18.11 v1(20.17,224.781) ; P16.11 v1(20.17,255.779) ; P14.11 v1(20.17,286.777) ; P12.11 v1(20.17,317.776) ; P10.11 v1(20.17,348.774) ; P8.11 v1(20.17,379.772) ; P6.11 v1(20.17,410.77) ; P4.11 v1(20.17,441.769) ; P2.11 v1(20.17,472.767)
M_C_22: P2.12 P4.12 P6.12 P8.12 P10.12 P12.12 P14.12 P16.12 P18.12 P20.12 P22.12 P24.12 P26.12 P28.12 P30.12 P32.12 | length 17.2
  Top Layer w0.254: v1(18.016,8.293) P32.12 ; v1(18.016,39.291) P30.12 ; v1(18.016,70.29) P28.12 ; v1(18.016,101.288) P26.12 ; v1(18.016,132.286) P24.12 ; v1(18.016,163.284) P22.12 ; v1(18.016,194.283) P20.12 ; v1(18.016,225.281) P18.12 ; v1(18.016,256.279) P16.12 ; v1(18.016,287.277) P14.12 ; v1(18.016,318.276) P12.12 ; v1(18.016,349.274) P10.12 ; v1(18.016,380.272) P8.12 ; v1(18.016,411.27) P6.12 ; v1(18.016,442.269) P4.12 ; v1(18.016,473.267) P2.12
M_C_23: P2.13 P4.13 P6.13 P8.13 P10.13 P12.13 P14.13 P16.13 P18.13 P20.13 P22.13 P24.13 P26.13 P28.13 P30.13 P32.13 | length 31
  Top Layer w0.254: P32.13 v1(21.03,8.793) ; P30.13 v1(21.03,39.791) ; P28.13 v1(21.03,70.79) ; P26.13 v1(21.03,101.788) ; P24.13 v1(21.03,132.786) ; P22.13 v1(21.03,163.784) ; P20.13 v1(21.03,194.783) ; P18.13 v1(21.03,225.781) ; P16.13 v1(21.03,256.779) ; P14.13 v1(21.03,287.777) ; P12.13 v1(21.03,318.776) ; P10.13 v1(21.03,349.774) ; P8.13 v1(21.03,380.772) ; P6.13 v1(21.03,411.77) ; P4.13 v1(21.03,442.769) ; P2.13 v1(21.03,473.767)
M_C_24: P2.14 P4.14 P6.14 P8.14 P10.14 P12.14 P14.14 P16.14 P18.14 P20.14 P22.14 P24.14 P26.14 P28.14 P30.14 P32.14 | length 31
  Top Layer w0.254: v1(17.156,9.293) P32.14 ; v1(17.156,40.291) P30.14 ; v1(17.156,71.29) P28.14 ; v1(17.156,102.288) P26.14 ; v1(17.156,133.286) P24.14 ; v1(17.156,164.284) P22.14 ; v1(17.156,195.283) P20.14 ; v1(17.156,226.281) P18.14 ; v1(17.156,257.279) P16.14 ; v1(17.156,288.277) P14.14 ; v1(17.156,319.276) P12.14 ; v1(17.156,350.274) P10.14 ; v1(17.156,381.272) P8.14 ; v1(17.156,412.27) P6.14 ; v1(17.156,443.269) P4.14 ; v1(17.156,474.267) P2.14
M_C_25: P2.15 P4.15 P6.15 P8.15 P10.15 P12.15 P14.15 P16.15 P18.15 P20.15 P22.15 P24.15 P26.15 P28.15 P30.15 P32.15 | length 17.2
  Top Layer w0.254: P32.15 v1(20.17,9.793) ; P30.15 v1(20.17,40.791) ; P28.15 v1(20.17,71.79) ; P26.15 v1(20.17,102.788) ; P24.15 v1(20.17,133.786) ; P22.15 v1(20.17,164.784) ; P20.15 v1(20.17,195.783) ; P18.15 v1(20.17,226.781) ; P16.15 v1(20.17,257.779) ; P14.15 v1(20.17,288.777) ; P12.15 v1(20.17,319.776) ; P10.15 v1(20.17,350.774) ; P8.15 v1(20.17,381.772) ; P6.15 v1(20.17,412.77) ; P4.15 v1(20.17,443.769) ; P2.15 v1(20.17,474.767)
M_C_26: P2.16 P4.16 P6.16 P8.16 P10.16 P12.16 P14.16 P16.16 P18.16 P20.16 P22.16 P24.16 P26.16 P28.16 P30.16 P32.16 | length 17.2
  Top Layer w0.254: v1(18.016,10.293) P32.16 ; v1(18.016,41.291) P30.16 ; v1(18.016,72.29) P28.16 ; v1(18.016,103.288) P26.16 ; v1(18.016,134.286) P24.16 ; v1(18.016,165.284) P22.16 ; v1(18.016,196.283) P20.16 ; v1(18.016,227.281) P18.16 ; v1(18.016,258.279) P16.16 ; v1(18.016,289.277) P14.16 ; v1(18.016,320.276) P12.16 ; v1(18.016,351.274) P10.16 ; v1(18.016,382.272) P8.16 ; v1(18.016,413.27) P6.16 ; v1(18.016,444.269) P4.16 ; v1(18.016,475.267) P2.16
M_C_27: P2.17 P4.17 P6.17 P8.17 P10.17 P12.17 P14.17 P16.17 P18.17 P20.17 P22.17 P24.17 P26.17 P28.17 P30.17 P32.17 | length 31
  Top Layer w0.254: P32.17 v1(21.03,10.793) ; P30.17 v1(21.03,41.791) ; P28.17 v1(21.03,72.79) ; P26.17 v1(21.03,103.788) ; P24.17 v1(21.03,134.786) ; P22.17 v1(21.03,165.784) ; P20.17 v1(21.03,196.783) ; P18.17 v1(21.03,227.781) ; P16.17 v1(21.03,258.779) ; P14.17 v1(21.03,289.777) ; P12.17 v1(21.03,320.776) ; P10.17 v1(21.03,351.774) ; P8.17 v1(21.03,382.772) ; P6.17 v1(21.03,413.77) ; P4.17 v1(21.03,444.769) ; P2.17 v1(21.03,475.767)
M_C_28: P2.18 P4.18 P6.18 P8.18 P10.18 P12.18 P14.18 P16.18 P18.18 P20.18 P22.18 P24.18 P26.18 P28.18 P30.18 P32.18 | length 31
  Top Layer w0.254: v1(17.156,11.293) P32.18 ; v1(17.156,42.291) P30.18 ; v1(17.156,73.29) P28.18 ; v1(17.156,104.288) P26.18 ; v1(17.156,135.286) P24.18 ; v1(17.156,166.284) P22.18 ; v1(17.156,197.283) P20.18 ; v1(17.156,228.281) P18.18 ; v1(17.156,259.279) P16.18 ; v1(17.156,290.277) P14.18 ; v1(17.156,321.276) P12.18 ; v1(17.156,352.274) P10.18 ; v1(17.156,383.272) P8.18 ; v1(17.156,414.27) P6.18 ; v1(17.156,445.269) P4.18 ; v1(17.156,476.267) P2.18
M_C_29: P2.19 P4.19 P6.19 P8.19 P10.19 P12.19 P14.19 P16.19 P18.19 P20.19 P22.19 P24.19 P26.19 P28.19 P30.19 P32.19 | length 17.2
  Top Layer w0.254: P32.19 v1(20.17,11.793) ; P30.19 v1(20.17,42.791) ; P28.19 v1(20.17,73.79) ; P26.19 v1(20.17,104.788) ; P24.19 v1(20.17,135.786) ; P22.19 v1(20.17,166.784) ; P20.19 v1(20.17,197.783) ; P18.19 v1(20.17,228.781) ; P16.19 v1(20.17,259.779) ; P14.19 v1(20.17,290.777) ; P12.19 v1(20.17,321.776) ; P10.19 v1(20.17,352.774) ; P8.19 v1(20.17,383.772) ; P6.19 v1(20.17,414.77) ; P4.19 v1(20.17,445.769) ; P2.19 v1(20.17,476.767)
M_C_30: P2.20 P4.20 P6.20 P8.20 P10.20 P12.20 P14.20 P16.20 P18.20 P20.20 P22.20 P24.20 P26.20 P28.20 P30.20 P32.20 | length 490.8
  Top Layer w0.254: v1(13.69,12.293) v1(18.016,12.293) P32.20 ; v1(13.716,477.266) v1(18.016,477.267) P2.20 ; v1(18.016,43.291) P30.20 ; v1(18.016,74.29) P28.20 ; v1(18.016,105.288) P26.20 ; v1(18.016,136.286) P24.20 ; v1(18.016,167.284) P22.20 ; v1(18.016,198.283) P20.20 ; v1(18.016,229.281) P18.20 ; v1(18.016,260.279) P16.20 ; v1(18.016,291.277) P14.20 ; v1(18.016,322.276) P12.20 ; v1(18.016,353.274) P10.20 ; v1(18.016,384.272) P8.20 ; v1(18.016,415.27) P6.20 ; v1(18.016,446.269) P4.20
  Bottom Layer w0.254: v1(13.69,12.293) v1@13.69,477.24
M_R_1: P1.5 P2.5 | length 17.5
  Top Layer w0.254: P1.5 19.092,469.766 P2.5 v1(21.03,469.767)
M_R_2: P3.5 P4.5 | length 17.5
  Top Layer w0.254: P3.5 19.092,438.768 P4.5 v1(21.03,438.769)
M_R_3: P5.5 P6.5 | length 17.5
  Top Layer w0.254: P5.5 19.092,407.77 P6.5 v1(21.03,407.77)
M_R_4: P7.5 P8.5 | length 17.5
  Top Layer w0.254: P7.5 19.092,376.771 P8.5 v1(21.03,376.772)
M_R_5: P9.5 P10.5 | length 17.5
  Top Layer w0.254: P9.5 P10.5 19.093,345.774 v1(21.03,345.774)
M_R_6: P11.5 P12.5 | length 17.5
  Top Layer w0.254: P11.5 P12.5 19.093,314.776 v1(21.03,314.776)
M_R_7: P13.5 P14.5 | length 17.5
  Top Layer w0.254: P13.5 P14.5 19.093,283.778 v1(21.03,283.777)
M_R_8: P15.5 P16.5 | length 17.5
  Top Layer w0.254: P15.5 P16.5 19.093,252.78 v1(21.03,252.779)
M_R_9: P17.5 P18.5 | length 17.5
  Top Layer w0.254: P17.5 P18.5 19.093,221.781 v1(21.03,221.781)
M_R_10: P19.5 P20.5 | length 17.5
  Top Layer w0.254: P19.5 P20.5 P20.5 v1(21.03,190.783)
M_R_11: P21.5 P22.5 | length 17.5
  Top Layer w0.254: P21.5 P22.5 P22.5 ; P22.5 v1(21.03,159.784)
M_R_12: P23.5 P24.5 | length 17.6
  Top Layer w0.254: P23.5 16.837,128.786 16.93,128.692 17.381,128.692 17.475,128.786 P24.5 P24.5 ; P24.5 v1(21.03,128.786)
M_R_13: P25.5 P26.5 | length 20.9
  Top Layer w0.254: P25.5 15.877,97.788 ; 16.837,97.788 16.916,97.708 ; 16.916,97.708 16.836,97.788 ; 17.474,97.788 17.395,97.708 ; P26.5 21.03,97.788 ; 15.878,97.788 16.836,97.788 ; 15.877,97.788 16.836,97.788 ; 16.916,97.708 16.93,97.695 17.381,97.695 17.395,97.708 ; 16.916,97.708 17.395,97.708 ; 17.396,97.708 17.475,97.788 ; 17.475,97.788 P26.5 17.475,97.788
M_R_14: P27.5 P28.5 | length 18.4
  Top Layer w0.254: P27.5 16.837,66.789 16.93,66.697 17.381,66.697 17.474,66.789 18.275,66.789 ; P28.5 v1(21.03,66.79) ; 18.275,66.789 P28.5 18.276,66.79
M_R_15: P29.5 P30.5 | length 17.6
  Top Layer w0.254: P29.5 16.837,35.791 16.93,35.699 17.381,35.699 17.474,35.791 P30.5 P30.5 ; P30.5 v1(21.03,35.791)
M_R_16: P31.5 P32.5 | length 17.6
  Top Layer w0.254: P31.5 16.837,4.793 16.93,4.7 17.381,4.7 17.474,4.793 P32.5 P32.5 ; P32.5 v1(21.03,4.793)
VCC: P1.1 P1.2 P2.1 P2.2 P3.1 P3.2 P4.1 P4.2 P5.1 P5.2 P6.1 P6.2 P7.1 P7.2 P8.1 P8.2 P9.1 P9.2 P10.1 P10.2 P11.1 P11.2 P12.1 P12.2 P13.1 P13.2 P14.1 P14.2 P15.1 P15.2 P16.1 P16.2 P17.1 P17.2 P18.1 P18.2 P19.1 P19.2 P20.1 P20.2 P21.1 P21.2 P22.1 P22.2 P23.1 P23.2 P24.1 P24.2 P25.1 P25.2 P26.1 P26.2 P27.1 P27.2 P28.1 P28.2 P29.1 P29.2 P30.1 P30.2 P31.1 P31.2 P32.1 P32.2 | length 604.1
  Top Layer w0.254: v1(1.566,3.293) P31.2 3.504,3.294 P32.2@19.093,3.294 ; v1(1.566,34.291) P29.2 3.504,34.292 P30.2@19.093,34.292 ; v1(1.566,65.289) P27.2 ; v1(1.566,96.288) P25.2 ; v1(1.566,127.286) P23.2 3.504,127.287 P24.2 ; v1(1.566,158.284) P21.2 3.504,158.285 P22.2 ; v1(1.566,189.282) P19.2 3.504,189.283 P20.2 ; v1(1.566,220.28) P17.2 3.504,220.281 P18.2 ; v1(1.566,251.279) P15.2 3.504,251.28 P16.2 17.156,251.279 ; v1(1.566,282.277) P13.2 3.504,282.278 P14.2 17.156,282.277 ; v1(1.566,313.275) P11.2 3.504,313.276 P12.2 17.156,313.276 ; v1(1.566,344.273) P9.2 3.504,344.274 P10.2 17.156,344.274 ; v1(1.566,375.271) P7.2 3.504,375.272 P8.2 17.156,375.272 ; v1(1.566,406.27) P5.2 3.504,406.271 P6.2 17.156,406.27 ; v1(1.566,437.268) P3.2 3.504,437.269 P4.2 17.156,437.269 ; v1(1.566,468.266) P1.2 3.504,468.267 P2.2 ; P31.1 P32.1 P32.1 ; P29.1 P30.1 P30.1 ; P27.1 P28.1 P28.1 ; P25.1 P26.1 18.258,95.788 ; P23.1 P24.1 P24.1 v1(21.03,126.786) ; P21.1 P22.1 P22.1 v1(21.03,157.784) ; P19.1 P20.1 P20.1 v1(21.03,188.783) ; P17.1 P18.1 P18.1 v1(21.03,219.781) ; P15.1 P16.1 P16.1 v1(21.03,250.779) ; P13.1 P14.1 P14.1 v1(21.03,281.777) ; P11.1 P12.1 P12.1 v1(21.03,312.776) ; P9.1 P10.1 P10.1 v1(21.03,343.774) ; P7.1 P8.1 P8.1 v1(21.03,374.772) ; P5.1 P6.1 P6.1 v1(21.03,405.77) ; P3.1 P4.1 P4.1 v1(21.03,436.769) ; P1.1 P2.1 P2.1 v1(21.03,467.767) ; 4.296,96.288 P25.2 ; 17.156,3.293 P32.2 ; 17.156,34.291 P30.2 ; 17.156,127.286 P24.2 ; 17.156,158.284 P22.2 ; 17.156,189.283 P20.2 ; 17.156,220.281 P18.2 ; 18.288,96.288 P26.2 ; P32.1 v1(21.03,2.793) ; P30.1 v1(21.03,33.791) ; P28.1 v1(21.03,64.79) ; P28.2 17.156,65.29 P27.2 ; P28.2 3.504,65.29 P27.2 ; P26.1 v1(21.03,95.788) ; P26.2 3.504,96.289 P25.2
pads on no net: P1.0 P2.0 P3.0 P4.0 P5.0 P6.0 P7.0 P8.0 P9.0 P10.0 P11.0 P12.0 P13.0 P14.0 P15.0 P16.0 P17.0 P18.0 P19.0 P20.0 P21.0 P22.0 P23.0 P24.0 P25.0 P26.0 P27.0 P28.0 P29.0 P30.0 P31.0 P32.0

## Keep-outs
Keep-Out Layer:
  lines w0.127: -2.238,0 -2.238,480 25,480 25,0 -2.238,0